# Altium PCB pcb.PcbDoc
Units mm, origin at the board's own origin, x right, y up, seen from the top; angles counter-clockwise.
Board outline 152.4 x 101.6 mm, 2 copper layers (Top Layer, Bottom Layer); 30 components, 26 nets, 122 pads, 0 vias.
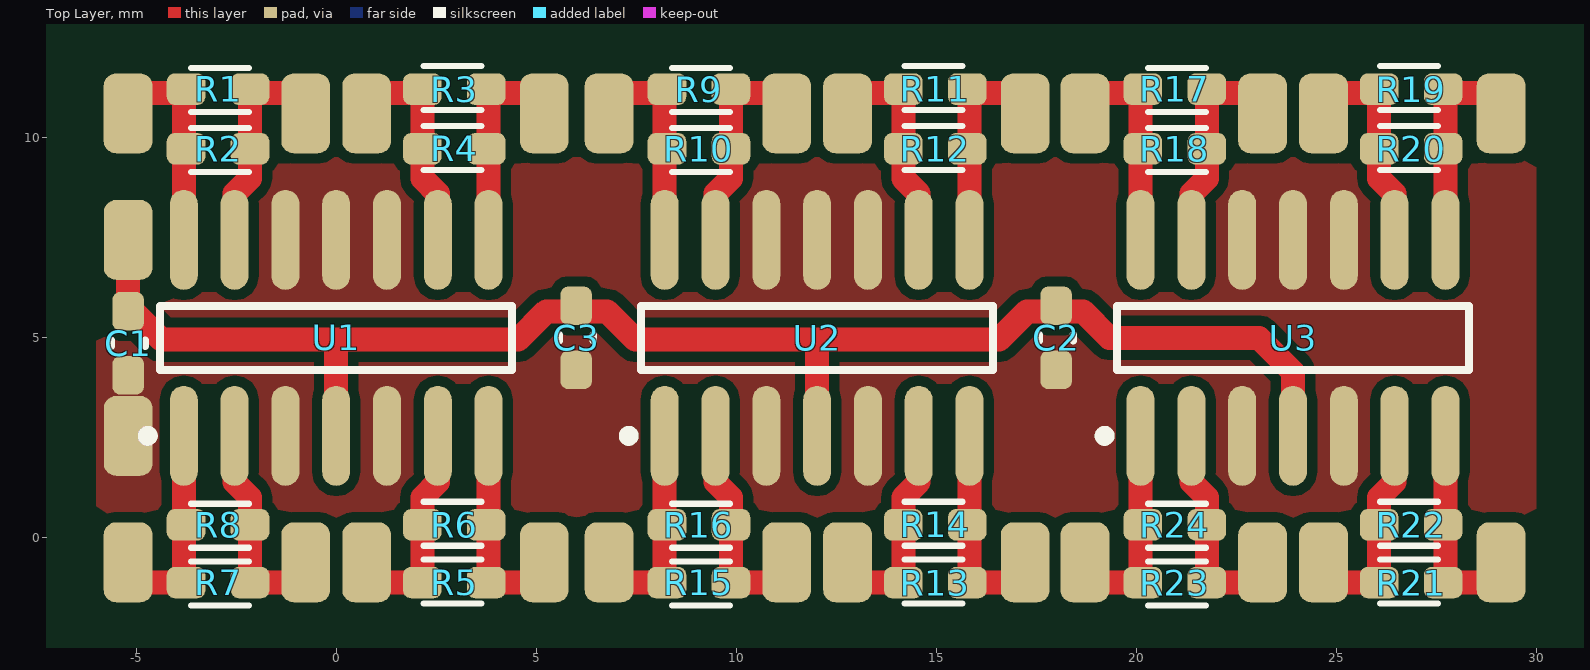
[diagram p0: Top Layer view]
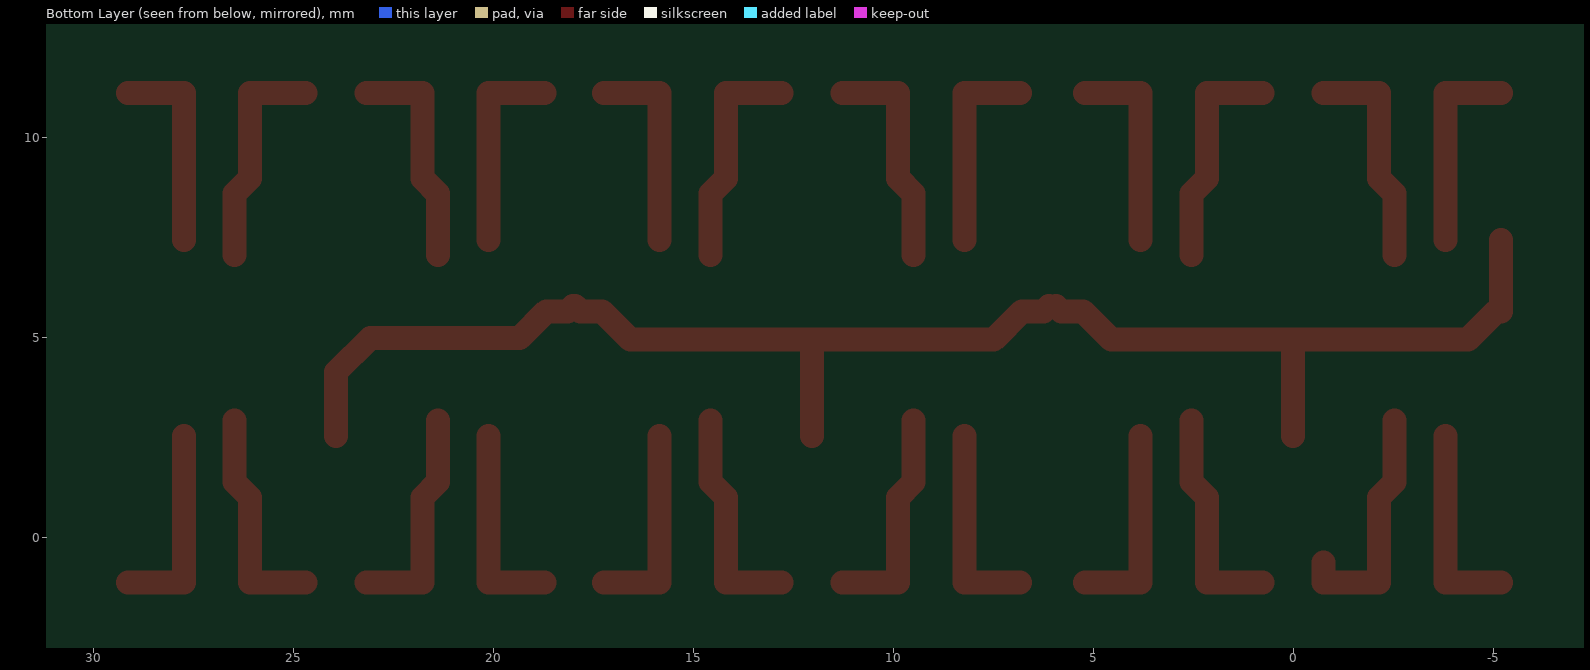
[diagram p1: Bottom Layer view, seen from below]
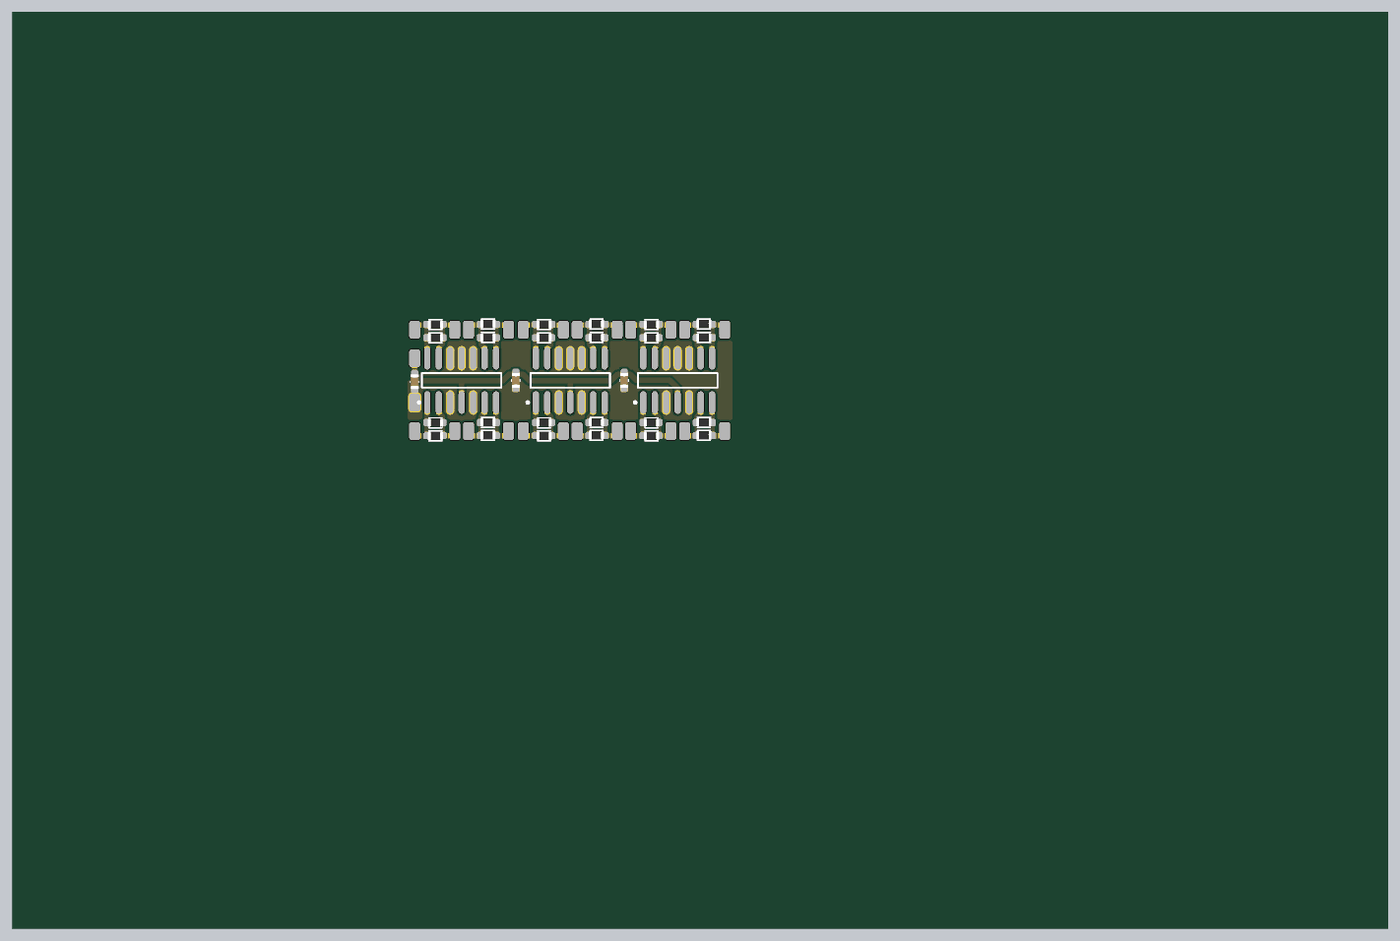
[diagram p2: 3D render of the assembled board from above, using the file's embedded part models]

## Layer stack, top to bottom
Top Solder: solder mask 0.0102, Solder Resist, Dk 3.5
Top Layer: signal copper 0.0356
Dielectric 1: dielectric 0.32, FR-4, Dk 4.8
Bottom Layer: signal copper 0.0356
Bottom Solder: solder mask 0.0102, Solder Resist, Dk 3.5

## Board outline
-49.784,-55.753 102.616,-55.753 102.616,45.847 -49.784,45.847

## Design rules (kind name [scope] priority, off if disabled: settings)
Clearance [All] p1: gap=0.127 ignorepadtopadclearanceinfootprint=FALSE except(0.254: Arc-Fill Arc-Poly Arc-Region Track-Fill Track-Poly Track-Region SMDPad-Fill SMDPad-Poly SMDPad-Region THPad-Fill THPad-Poly THPad-Region Via-Fill Via-Poly Via-Region Fill-Fill Fill-Poly Fill-Region Poly-Poly Poly-Region Region-Region)
PolygonConnect [All] p1: connectstyle=Direct reliefconductorwidth=0.254 reliefentries=4 polygonreliefangle="90 Angle" airgapwidth=0.254
RoutingVias [All] p1: holewidth=0.711 width=1.27 viastyle="Through Hole" minholewidth=0.711 minwidth=1.27 maxholewidth=0.711 maxwidth=1.27
SolderMaskExpansion [All] p1: expansion=0.102
Width [All] p1: maxlimit=500 minlimit=0.254 preferedwidth=0.254
30 further rules are at their usual default settings.

## Classes and differential pairs
component class sch: C1 C2 C3 R2 R8 R12 R14 R15 R16 R17 R18 R19 R20 R21 R22 R23 R24 U1 U2 U3

## Components (designator, comment, footprint, x,y, rotation, side; value= is the part's Value field where it differs from the comment)
C1 "2.2UF 25V" RC_0603 -5.199,4.864 r90 top value="CAP CER 2.2UF 25V X5R 0603"
C2 "2.2UF 25V" RC_0603 18,5 r90 top value="CAP CER 2.2UF 25V X5R 0603"
C3 "2.2UF 25V" RC_0603 6,5 r90 top value="CAP CER 2.2UF 25V X5R 0603"
R1 "560K-1%" RR_0603 -2.904,11.193 r0 top value="RES SMD 560K OHM 1% 1/10W 0603"
R2 "560K-1%" RR_0603 -2.904,9.699 r0 top value="RES SMD 560K OHM 1% 1/10W 0603"
R3 "560K-1%" RR_0603 2.904,11.243 r180 top value="RES SMD 560K OHM 1% 1/10W 0603"
R4 "560K-1%" RR_0603 2.904,9.749 r180 top value="RES SMD 560K OHM 1% 1/10W 0603"
R5 "560K-1%" RR_0603 2.904,-1.093 r180 top value="RES SMD 560K OHM 1% 1/10W 0603"
R6 "560K-1%" RR_0603 2.904,0.351 r180 top value="RES SMD 560K OHM 1% 1/10W 0603"
R7 "560K-1%" RR_0603 -2.904,-1.143 r0 top value="RES SMD 560K OHM 1% 1/10W 0603"
R8 "560K-1%" RR_0603 -2.904,0.301 r0 top value="RES SMD 560K OHM 1% 1/10W 0603"
R9 "560K-1%" RR_0603 9.12,11.193 r0 top value="RES SMD 560K OHM 1% 1/10W 0603"
R10 "560K-1%" RR_0603 9.12,9.699 r0 top value="RES SMD 560K OHM 1% 1/10W 0603"
R11 "560K-1%" RR_0603 14.928,11.243 r180 top value="RES SMD 560K OHM 1% 1/10W 0603"
R12 "560K-1%" RR_0603 14.928,9.749 r180 top value="RES SMD 560K OHM 1% 1/10W 0603"
R13 "560K-1%" RR_0603 14.928,-1.093 r180 top value="RES SMD 560K OHM 1% 1/10W 0603"
R14 "560K-1%" RR_0603 14.928,0.351 r180 top value="RES SMD 560K OHM 1% 1/10W 0603"
R15 "560K-1%" RR_0603 9.12,-1.143 r0 top value="RES SMD 560K OHM 1% 1/10W 0603"
R16 "560K-1%" RR_0603 9.12,0.301 r0 top value="RES SMD 560K OHM 1% 1/10W 0603"
R17 "560K-1%" RR_0603 21.017,11.193 r0 top value="RES SMD 560K OHM 1% 1/10W 0603"
R18 "560K-1%" RR_0603 21.017,9.699 r0 top value="RES SMD 560K OHM 1% 1/10W 0603"
R19 "560K-1%" RR_0603 26.825,11.243 r180 top value="RES SMD 560K OHM 1% 1/10W 0603"
R20 "560K-1%" RR_0603 26.825,9.749 r180 top value="RES SMD 560K OHM 1% 1/10W 0603"
R21 "560K-1%" RR_0603 26.825,-1.093 r180 top value="RES SMD 560K OHM 1% 1/10W 0603"
R22 "560K-1%" RR_0603 26.825,0.351 r180 top value="RES SMD 560K OHM 1% 1/10W 0603"
R23 "560K-1%" RR_0603 21.017,-1.143 r0 top value="RES SMD 560K OHM 1% 1/10W 0603"
R24 "560K-1%" RR_0603 21.017,0.301 r0 top value="RES SMD 560K OHM 1% 1/10W 0603"
U1 "MCP604" RR_SO14 0,5 r90 top
U2 "MCP604" RR_SO14 12.024,5 r90 top
U3 "MCP604" RR_SO14 23.921,5 r90 top

## Footprints (in the part's own frame and the unit in brackets; to place one, negate y for a bottom-side part, rotate by r counter-clockwise, add the part's x,y. Pads: shape width x height; smd on the part's side, far side on the other; paste and mask are expansions set on the pad)
RC_0603 [mil] "Chip Capacitor"
  rrect50% 38x31 smd mask+0.98: 1(-31.5,0) 2(31.5,0)
  silkscreen extent -3,-17 3,17, body extent -33,-18 33,18, height 35
RR_0603 [mil]
  rrect50% 38x31 smd mask+0.98: 1(-33.47,0.98) 2(29.53,0.98)
  silkscreen extent -29,-22 29,22, body extent -33,-18 33,18, height 22
RR_SO14 [mm] "SOIC, 14-Leads, Body 8.7x3.9mm, Pitch 1.27mm, IPC Low Density"
  oval 2.5x0.7 smd: 1(-2.45,3.81) 2(-2.45,2.54) 3(-2.45,1.27) 4(-2.45,0) 5(-2.45,-1.27) 6(-2.45,-2.54) 7(-2.45,-3.81) 8(2.45,-3.81) 9(2.45,-2.54) 10(2.45,-1.27) 11(2.45,0) 12(2.45,1.27) 13(2.45,2.54) 14(2.45,3.81)
  silkscreen extent -2.57,-4.4 0.8,4.83, body extent -2,-4.38 2,4.38, height 1.75

## Part data
C1 C2 C3: library part "CAP_0603_2.2UF 25V", Manufacturer=Murata, Package=0603, Commentary="2.2UF 25V", Cost=0,15, Order number=GRM188R61E225KA12D, Part Number="CAP_0603_2.2UF 25V"
R1 R2 R3 R4 R5 R6 R7 R8 R9 R10 R11 R12 R13 R14 R15 R16 R17 R18 R19 R20 R21 R22 R23 R24: library part RES, Manufacturer=Yageo, Package=0603, Commentary=560K-1%, Cost=0,1, Order number=RC0603FR-07560KL

## Free pads (board coordinates)
  rrect50% 1.22x2 smd: 1(-5.202,-0.612) 1(-5.202,10.612) 1(-5.199,2.55) 1(-5.199,7.45) 1(-0.762,-0.612) 1(-0.762,10.612) 1(0.762,-0.612) 1(0.762,10.612) 1(5.202,-0.612) 1(5.202,10.612) 1(6.822,-0.612) 1(6.822,10.612) 1(11.262,-0.612) 1(11.262,10.612) 1(12.786,-0.612) 1(12.786,10.612) 1(17.226,-0.612) 1(17.226,10.612) 1(18.719,-0.612) 1(18.719,10.612) 1(23.159,-0.612) 1(23.159,10.612) 1(24.683,-0.612) 1(24.683,10.612) 1(29.123,-0.612) 1(29.123,10.612)

## Nets (pads, with @x,y where several pads share a name; then routed paths per layer and width w, separated by ;. In a path a pad name is that pad's centre, name@x,y a point inside that pad or via, vN(x,y) a via of type N, cw(c..) or ccw(c..) an arc to the next point about the centre after c; other vN are vias at no path point)
+5: C1.2 C2.2 C3.2 pad.1@-5.199,7.45 U1.4 U2.4 U3.4 | length 38.7
  Top Layer w0.6: C1.2 pad.1@-5.199,7.45 ; C1.2@-5.08,5.664 -4.369,4.953 0,4.953 ; U1.4 0,4.953 ; C3.2@5.921,5.8 5.785,5.664 5.252,5.664 4.541,4.953 0,4.953 ; C3.2@6.103,5.8 6.239,5.664 6.772,5.664 7.483,4.953 16.565,4.953 17.276,5.664 17.809,5.664 C2.2@17.945,5.8 ; U2.4 12.024,4.699 ; C2.2 18.136,5.664 18.669,5.664 19.333,5 23.067,5 23.921,4.146 U3.4
GND: C1.1 C2.1 C3.1 pad.1@-5.199,2.55 U1.3 U1.5 U1.10 U1.11 U1.12 U2.3 U2.5 U2.10 U2.11 U2.12 U3.3 U3.5 U3.10 U3.11 U3.12
NetR1_1: pad.1@-5.202,10.612 R1.1 R2.1 U1.14 | length 5.1
  Top Layer w0.6: pad.1@-5.202,11.118 -3.81,11.118 U1.14
NetR1_2: pad.1@-0.762,10.612 R1.2 R2.2 U1.13 | length 5.6
  Top Layer w0.6: U1.13@-2.54,7.069 U1.13 -2.54,8.603 -2.154,8.989 -2.154,9.674 -2.154,11.118 pad.1@-0.762,11.118
NetR3_1: pad.1@5.202,10.612 R3.1 R4.1 U1.8 | length 5.1
  Top Layer w0.6: U1.8 3.81,11.118 pad.1@5.202,11.118
NetR3_2: pad.1@0.762,10.612 R3.2 R4.2 U1.9 | length 5.6
  Top Layer w0.6: pad.1@0.762,11.118 2.154,11.118 2.154,9.674 2.154,8.989 2.54,8.603 U1.9 U1.9@2.54,7.069
NetR5_1: pad.1@5.202,-0.612 R5.1 R6.1 U1.7 | length 5.1
  Top Layer w0.6: U1.7 3.81,-1.118 pad.1@5.202,-1.118
NetR5_2: pad.1@0.762,-0.612 R5.2 R6.2 U1.6 | length 5.6
  Top Layer w0.6: pad.1@0.762,-1.118 R5.2 R6.2 2.154,1.011 2.54,1.397 U1.6 U1.6@2.54,2.931
NetR7_1: pad.1@-5.202,-0.612 R7.1 R8.1 U1.1 | length 5.1
  Top Layer w0.6: pad.1@-5.202,-1.118 -3.81,-1.118 U1.1
NetR7_2: pad.1@-0.762,-0.612 R7.2 R8.2 U1.2 | length 6.1
  Top Layer w0.6: U1.2@-2.54,2.931 U1.2 -2.54,1.397 -2.154,1.011 R8.2 R7.2 -0.762,-1.118 pad.1@-0.762,-0.612
NetR9_1: pad.1@6.822,10.612 R9.1 R10.1 U2.14 | length 5.1
  Top Layer w0.6: pad.1@6.822,11.118 8.214,11.118 U2.14
NetR9_2: pad.1@11.262,10.612 R9.2 R10.2 U2.13 | length 5.6
  Top Layer w0.6: U2.13@9.484,7.069 U2.13 9.484,8.603 9.87,8.989 9.87,9.674 9.87,11.118 pad.1@11.262,11.118
NetR11_1: pad.1@17.226,10.612 R11.1 R12.1 U2.8 | length 5.1
  Top Layer w0.6: U2.8 15.834,11.118 pad.1@17.226,11.118
NetR11_2: pad.1@12.786,10.612 R11.2 R12.2 U2.9 | length 5.6
  Top Layer w0.6: pad.1@12.786,11.118 14.178,11.118 14.178,9.674 14.178,8.989 14.564,8.603 U2.9 U2.9@14.564,7.069
NetR13_1: pad.1@17.226,-0.612 R13.1 R14.1 U2.7 | length 5.1
  Top Layer w0.6: U2.7 15.834,-1.118 pad.1@17.226,-1.118
NetR13_2: pad.1@12.786,-0.612 R13.2 R14.2 U2.6 | length 5.6
  Top Layer w0.6: pad.1@12.786,-1.118 R13.2 R14.2 14.178,1.011 14.564,1.397 U2.6 U2.6@14.564,2.931
NetR15_1: pad.1@6.822,-0.612 R15.1 R16.1 U2.1 | length 5.1
  Top Layer w0.6: pad.1@6.822,-1.118 8.214,-1.118 U2.1
NetR15_2: pad.1@11.262,-0.612 R15.2 R16.2 U2.2 | length 5.6
  Top Layer w0.6: U2.2@9.484,2.931 U2.2 9.484,1.397 9.87,1.011 R16.2 R15.2 pad.1@11.262,-1.118
NetR17_1: pad.1@18.719,10.612 R17.1 R18.1 U3.14 | length 5.1
  Top Layer w0.6: pad.1@18.719,11.118 20.111,11.118 U3.14
NetR17_2: pad.1@23.159,10.612 R17.2 R18.2 U3.13 | length 5.6
  Top Layer w0.6: U3.13@21.381,7.069 U3.13 21.381,8.603 21.767,8.989 21.767,9.674 21.767,11.118 pad.1@23.159,11.118
NetR19_1: pad.1@29.123,10.612 R19.1 R20.1 U3.8 | length 5.1
  Top Layer w0.6: U3.8 27.731,11.118 pad.1@29.123,11.118
NetR19_2: pad.1@24.683,10.612 R19.2 R20.2 U3.9 | length 5.6
  Top Layer w0.6: pad.1@24.683,11.118 26.075,11.118 26.075,9.674 26.075,8.989 26.461,8.603 U3.9 U3.9@26.461,7.069
NetR21_1: pad.1@29.123,-0.612 R21.1 R22.1 U3.7 | length 5.1
  Top Layer w0.6: U3.7 27.731,-1.118 pad.1@29.123,-1.118
NetR21_2: pad.1@24.683,-0.612 R21.2 R22.2 U3.6 | length 5.6
  Top Layer w0.6: pad.1@24.683,-1.118 R21.2 R22.2 26.075,1.011 26.461,1.397 U3.6 U3.6@26.461,2.931
NetR23_1: pad.1@18.719,-0.612 R23.1 R24.1 U3.1 | length 5.1
  Top Layer w0.6: pad.1@18.719,-1.118 20.111,-1.118 U3.1
NetR23_2: pad.1@23.159,-0.612 R23.2 R24.2 U3.2 | length 5.6
  Top Layer w0.6: U3.2@21.381,2.931 U3.2 21.381,1.397 21.767,1.011 R24.2 R23.2 pad.1@23.159,-1.118

## Polygon pours and split planes (outlines as drawn)
GND on Top Layer (solid, remove dead copper, pour order 0): 30,12 30,-2 -6,-2 -6,12